# Altium PCB miaow-foc-board.pcbdoc (part 2 of 10)
Units mil, origin at the board's own origin, x right, y up, seen from the top; angles counter-clockwise.
Board outline 2755.91 x 3149.61 mil, 6 copper layers (SIG1, GND2, SIG3, PWR4, GND5, SIG6), stack 60.566 mil thick; 437 components, 392 nets, 2120 pads, 1697 vias.
Unrouted connection lines stored in the file: 1090.
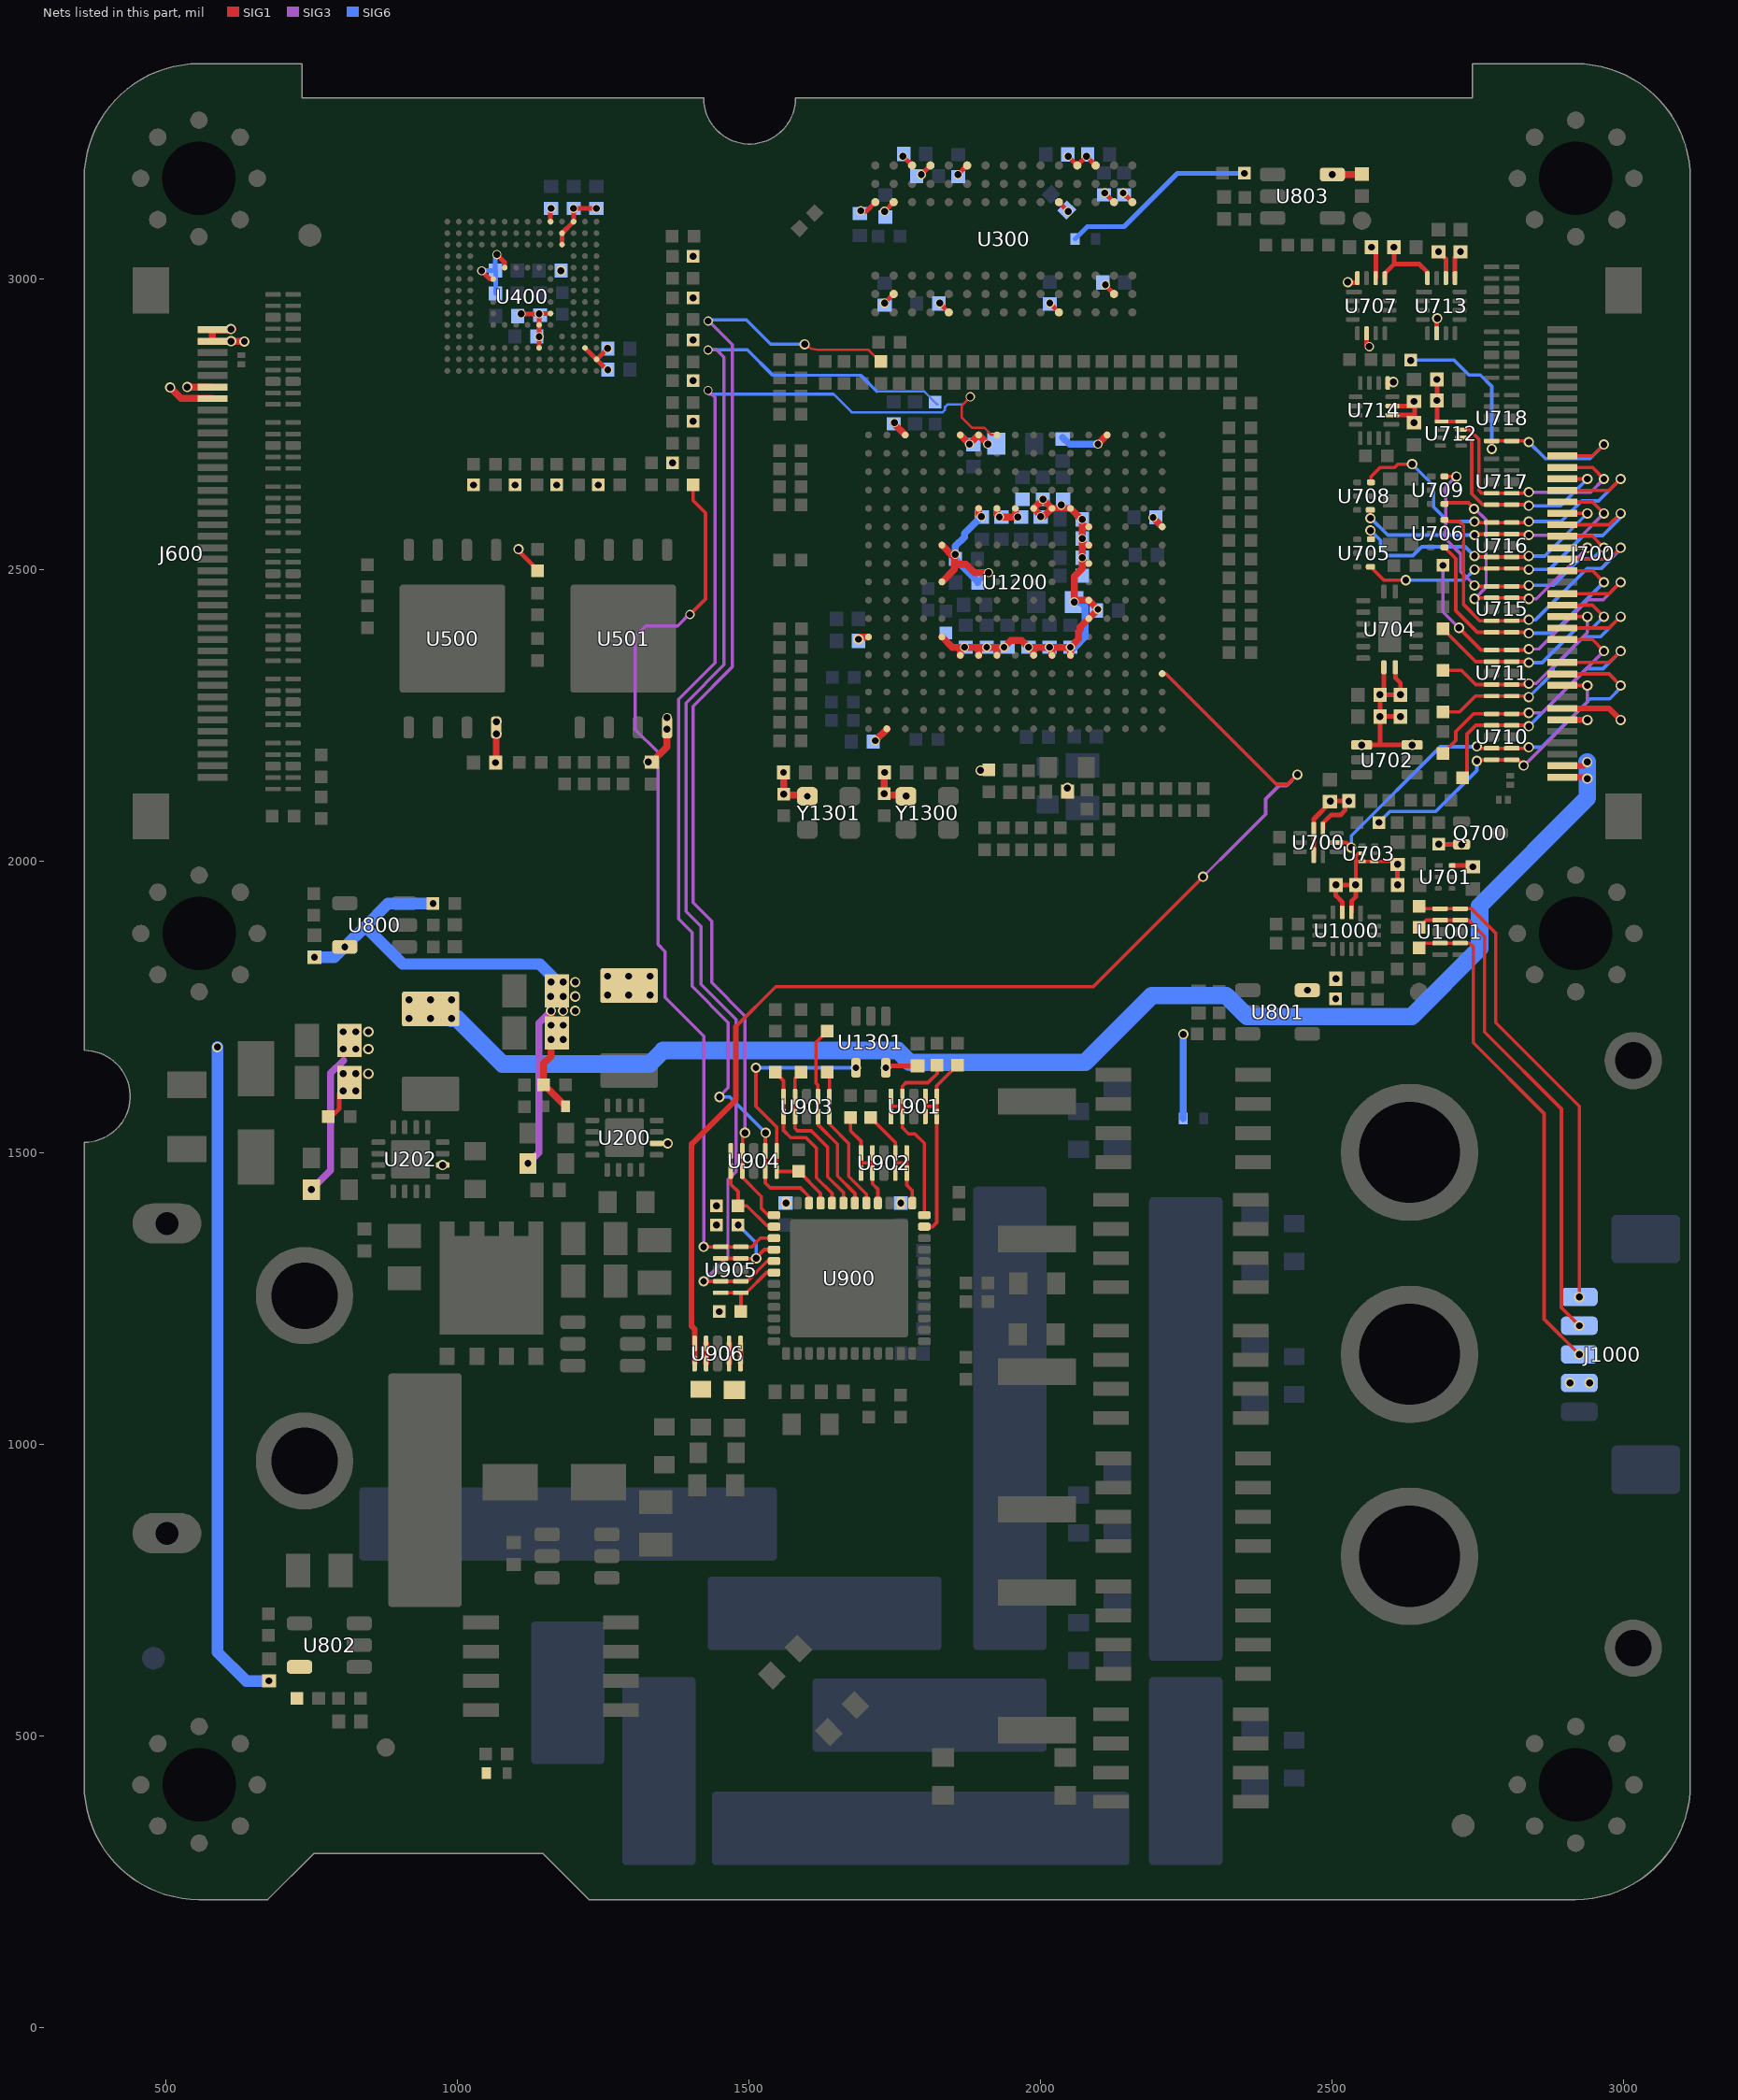
[diagram p6: the nets of this part, all layers, seen from the top]

## Footprints (in the part's own frame and the unit in brackets; to place one, negate y for a bottom-side part, rotate by r counter-clockwise, add the part's x,y. Pads: shape width x height; smd on the part's side, far side on the other; paste and mask are expansions set on the pad) (continued)
IS42S32800J-6BLI [mm] "BGA, 90-Leads, Body 8.00x13.00mmx1.20mm, Pitch 0.80mm"
  round 0.36 smd: A1(-3.2,5.6) A2(-2.4,5.6) A3(-1.6,5.6) A7(1.6,5.6) A8(2.4,5.6) A9(3.2,5.6) B1(-3.2,4.8) B2(-2.4,4.8) B3(-1.6,4.8) B7(1.6,4.8) B8(2.4,4.8) B9(3.2,4.8) C1(-3.2,4) C2(-2.4,4) C3(-1.6,4) C7(1.6,4) C8(2.4,4) C9(3.2,4) D1(-3.2,3.2) D2(-2.4,3.2) D3(-1.6,3.2) D7(1.6,3.2) D8(2.4,3.2) D9(3.2,3.2) E1(-3.2,2.4) E2(-2.4,2.4) E3(-1.6,2.4) E7(1.6,2.4) E8(2.4,2.4) E9(3.2,2.4) F1(-3.2,1.6) F2(-2.4,1.6) F3(-1.6,1.6) F7(1.6,1.6) F8(2.4,1.6) F9(3.2,1.6) G1(-3.2,0.8) G2(-2.4,0.8) G3(-1.6,0.8) G7(1.6,0.8) G8(2.4,0.8) G9(3.2,0.8) H1(-3.2,0) H2(-2.4,0) H3(-1.6,0) H7(1.6,0) H8(2.4,0) H9(3.2,0) J1(-3.2,-0.8) J2(-2.4,-0.8) J3(-1.6,-0.8) J7(1.6,-0.8) J8(2.4,-0.8) J9(3.2,-0.8) K1(-3.2,-1.6) K2(-2.4,-1.6) K3(-1.6,-1.6) K7(1.6,-1.6) K8(2.4,-1.6) K9(3.2,-1.6) L1(-3.2,-2.4) L2(-2.4,-2.4) L3(-1.6,-2.4) L7(1.6,-2.4) L8(2.4,-2.4) L9(3.2,-2.4) M1(-3.2,-3.2) M2(-2.4,-3.2) M3(-1.6,-3.2) M7(1.6,-3.2) M8(2.4,-3.2) M9(3.2,-3.2) N1(-3.2,-4) N2(-2.4,-4) N3(-1.6,-4) N7(1.6,-4) N8(2.4,-4) N9(3.2,-4) P1(-3.2,-4.8) P2(-2.4,-4.8) P3(-1.6,-4.8) P7(1.6,-4.8) P8(2.4,-4.8) P9(3.2,-4.8) R1(-3.2,-5.6) R2(-2.4,-5.6) R3(-1.6,-5.6) R7(1.6,-5.6) R8(2.4,-5.6) R9(3.2,-5.6)
  silkscreen extent -4,-6.5 4,6.5, body extent -4,-6.5 4,6.5, height 1.2
KLMAG2GEND-B031 [mm] "BGA, 153-Leads, Body 11.50x13.00mmx1.00mm, Pitch 0.50mm"
  round 0.25 smd: A1(-3.25,3.25) A2(-2.75,3.25) A3(-2.25,3.25) A4(-1.75,3.25) A5(-1.25,3.25) A6(-0.75,3.25) A7(-0.25,3.25) A8(0.25,3.25) A9(0.75,3.25) A10(1.25,3.25) A11(1.75,3.25) A12(2.25,3.25) A13(2.75,3.25) A14(3.25,3.25) B1(-3.25,2.75) B2(-2.75,2.75) B3(-2.25,2.75) B4(-1.75,2.75) B5(-1.25,2.75) B6(-0.75,2.75) B7(-0.25,2.75) B8(0.25,2.75) B9(0.75,2.75) B10(1.25,2.75) B11(1.75,2.75) B12(2.25,2.75) B13(2.75,2.75) B14(3.25,2.75) C1(-3.25,2.25) C2(-2.75,2.25) C3(-2.25,2.25) C4(-1.75,2.25) C5(-1.25,2.25) C6(-0.75,2.25) C7(-0.25,2.25) C8(0.25,2.25) C9(0.75,2.25) C10(1.25,2.25) C11(1.75,2.25) C12(2.25,2.25) C13(2.75,2.25) C14(3.25,2.25) D1(-3.25,1.75) D2(-2.75,1.75) D3(-2.25,1.75) D4(-1.75,1.75) D12(2.25,1.75) D13(2.75,1.75) D14(3.25,1.75) E1(-3.25,1.25) E2(-2.75,1.25) E3(-2.25,1.25) E5(-1.25,1.25) E6(-0.75,1.25) E7(-0.25,1.25) E8(0.25,1.25) E9(0.75,1.25) E10(1.25,1.25) E12(2.25,1.25) E13(2.75,1.25) E14(3.25,1.25) F1(-3.25,0.75) F2(-2.75,0.75) F3(-2.25,0.75) F5(-1.25,0.75) F10(1.25,0.75) F12(2.25,0.75) F13(2.75,0.75) F14(3.25,0.75) G1(-3.25,0.25) G2(-2.75,0.25) G3(-2.25,0.25) G5(-1.25,0.25) G10(1.25,0.25) G12(2.25,0.25) G13(2.75,0.25) G14(3.25,0.25) H1(-3.25,-0.25) H2(-2.75,-0.25) H3(-2.25,-0.25) H5(-1.25,-0.25) H10(1.25,-0.25) H12(2.25,-0.25) H13(2.75,-0.25) H14(3.25,-0.25) J1(-3.25,-0.75) J2(-2.75,-0.75) J3(-2.25,-0.75) J5(-1.25,-0.75) J10(1.25,-0.75) J12(2.25,-0.75) J13(2.75,-0.75) J14(3.25,-0.75) K1(-3.25,-1.25) K2(-2.75,-1.25) K3(-2.25,-1.25) K5(-1.25,-1.25) K6(-0.75,-1.25) K7(-0.25,-1.25) K8(0.25,-1.25) K9(0.75,-1.25) K10(1.25,-1.25) K12(2.25,-1.25) K13(2.75,-1.25) K14(3.25,-1.25) L1(-3.25,-1.75) L2(-2.75,-1.75) L3(-2.25,-1.75) L12(2.25,-1.75) L13(2.75,-1.75) L14(3.25,-1.75) M1(-3.25,-2.25) M2(-2.75,-2.25) M3(-2.25,-2.25) M4(-1.75,-2.25) M5(-1.25,-2.25) M6(-0.75,-2.25) M7(-0.25,-2.25) M8(0.25,-2.25) M9(0.75,-2.25) M10(1.25,-2.25) M11(1.75,-2.25) M12(2.25,-2.25) M13(2.75,-2.25) M14(3.25,-2.25) N1(-3.25,-2.75) N2(-2.75,-2.75) N3(-2.25,-2.75) N4(-1.75,-2.75) N5(-1.25,-2.75) N6(-0.75,-2.75) N7(-0.25,-2.75) N8(0.25,-2.75) N9(0.75,-2.75) N10(1.25,-2.75) N11(1.75,-2.75) N12(2.25,-2.75) N13(2.75,-2.75) N14(3.25,-2.75) P1(-3.25,-3.25) P2(-2.75,-3.25) P3(-2.25,-3.25) P4(-1.75,-3.25) P5(-1.25,-3.25) P6(-0.75,-3.25) P7(-0.25,-3.25) P8(0.25,-3.25) P9(0.75,-3.25) P10(1.25,-3.25) P11(1.75,-3.25) P12(2.25,-3.25) P13(2.75,-3.25) P14(3.25,-3.25)
  silkscreen extent -5.75,-6.5 5.75,6.5, body extent -5.75,-6.5 5.75,6.5, height 1
L0402 [mm] "Chip Inductor, 2-Leads, Body 1.00x0.50mm, IPC Medium Density"
  rect 0.56x0.62 smd: 1(-0.47,0) 2(0.47,0)
  body extent -0.53,-0.28 0.53,0.28, height 0.55
LCC40PW-M [mm]
  round 6 hole 4.4: 1(-8.8,-11.079) 2(0,-11.079) 3(8.8,-11.079)
  round 2.5 hole 1.6: ""(-12.8,-1.329) ""(12.8,-1.329)
  body extent -14.23,-14.45 14.23,14.45, height 13.55
LM74700QDBVR-Q1 [mm] "SOT23, 6-Leads, Body 2.90x2.80mm, Pitch 0.95mm, IPC Medium Density"
  rrect50% 1.1x0.6 smd: 1(-1.3,0.95) 2(-1.3,0) 3(-1.3,-0.95) 4(1.3,-0.95) 5(1.3,0) 6(1.3,0.95)
  silkscreen extent -0.56,0.7 -0.05,1.2, body extent -1.5,-1.53 1.5,1.53, height 1.45
MARKPOINT-1.0#1 [mm]
  round 1 smd: ""(0,0)
  round 3 on Bottom Solder: ""(0,0)
  SIG1 pour cut-out: 0,-1.494 -0.572,-1.38 -1.056,-1.056 -1.38,-0.572 -1.494,0 -1.494,0 -1.38,0.572 -1.056,1.056 -0.572,1.38 0,1.494 0,1.494 0.572,1.38 1.056,1.056 1.38,0.572 1.494,0 1.494,0 1.38,-0.572 1.056,-1.056 0.572,-1.38 0,-1.494
MARKPOINT-1.0#2 [mm]
  round 1 smd: ""(0,0)
  round 3 on Top Solder: ""(0,0)
  SIG1 pour cut-out: 0,-1.494 -0.572,-1.38 -1.056,-1.056 -1.38,-0.572 -1.494,0 -1.494,0 -1.38,0.572 -1.056,1.056 -0.572,1.38 0,1.494 0,1.494 0.572,1.38 1.056,1.056 1.38,0.572 1.494,0 1.494,0 1.38,-0.572 1.056,-1.056 0.572,-1.38 0,-1.494
MOLEX-532610571 [mm]
  rrect50% 0.8x1.6 smd: 1(2.5,-1.45) 2(1.25,-1.45) 3(0,-1.45) 4(-1.25,-1.45) 5(-2.5,-1.45)
  rrect20% 2.1x3 smd: PAD(-5.023,1.45) PAD(5.023,1.45)
  body extent -5.55,-2 5.55,3.2, height 3.4
MX25L25645GZ2I-08G [mm] "SON, 8-Leads, Body 6.00x8.00mm, Pitch 1.27mm, Thermal Pad 4.60x4.70mm, IPC Medium Density"
  rrect50% 0.95x0.45 smd: 1(-3.87,1.905) 2(-3.87,0.635) 3(-3.87,-0.635) 4(-3.87,-1.905) 5(3.87,-1.905) 6(3.87,-0.635) 7(3.87,0.635) 8(3.87,1.905)
  rrect5% 4.7x4.6 smd paste-2.35: 9(0,0)
  silkscreen extent -3.19,1.65 -2.69,2.16, body extent -4.1,-3.05 4.1,3.05, height 0.8
NTC0402 [mm] "Chip Resistor, 2-Leads, Body 1.00x0.50mm, IPC Medium Density"
  rect 0.4x0.5 smd: 1(-0.451,0) 2(0.451,0)
  body extent -0.53,-0.28 0.53,0.28, height 0.55
OK252032768KJBA4SL [mm]
  rrect50% 0.9x0.8 smd: 1(-0.925,-0.725) 2(0.925,-0.725) 3(0.925,0.725) 4(-0.925,0.725)
  silkscreen extent -0.27,-0.98 0.23,-0.47, body extent -1.25,-1 1.25,1, height 0.8
OT252025MJBA4SL [mm]
  rrect50% 0.9x0.8 smd: 1(-0.925,-0.725) 2(0.925,-0.725) 3(0.925,0.725) 4(-0.925,0.725)
  silkscreen extent -0.27,-0.98 0.23,-0.47, body extent -1.25,-1 1.25,1, height 0.8
PESD5V0H1BSF [mm] "DFN, 2-Leads, Body 0.30x0.60mm, Pitch 0.40mm, IPC Medium Density"
  rect 0.25x0.35 smd: 1(-0.2,0) 2(0.2,0)
  body extent -0.31,-0.16 0.31,0.16, height 0.32
POSHOLE-3.2 [mil] "3.2mm hole"
  round 30 smd: ""(-100,0) ""(-70.71,-70.71) ""(-70.71,70.71) ""(0,100) ""(0,-100) ""(70.71,-70.71) ""(70.71,70.71) ""(100,0)
  round 30 smd far side: ""(-100,0) ""(-70.71,-70.71) ""(-70.71,70.71) ""(0,100) ""(0,-100) ""(70.71,-70.71) ""(70.71,70.71) ""(100,0)
  round 0 hole 125.98 unplated: ""(0,0)
  SIG1 pour cut-out: 0,-125 -47.84,-115.48 -88.39,-88.39 -115.48,-47.84 -125,0 -125,0 -115.48,47.84 -88.39,88.39 -47.84,115.48 0,125 0,125 47.84,115.48 88.39,88.39 115.48,47.84 125,0 125,0 115.48,-47.84 88.39,-88.39 47.84,-115.48 0,-125
  SIG6 pour cut-out: 0,-125 -47.84,-115.48 -88.39,-88.39 -115.48,-47.84 -125,0 -125,0 -115.48,47.84 -88.39,88.39 -47.84,115.48 0,125 0,125 47.84,115.48 88.39,88.39 115.48,47.84 125,0 125,0 115.48,-47.84 88.39,-88.39 47.84,-115.48 0,-125
  silkscreen extent -125,-125 125,125
R0402 [mm] "Chip Resistor, 2-Leads, Body 1.00x0.50mm, IPC Medium Density"
  rect 0.55x0.55 smd: 1(-0.475,0) 2(0.475,0)
  body extent -0.55,-0.28 0.55,0.28, height 0.4
R0603 [mm] "Chip Resistor, 2-Leads, Body 1.60x0.80mm, IPC Medium Density"
  rect 0.75x0.9 smd: 1(-0.825,0) 2(0.825,0)
  body extent -0.85,-0.45 0.85,0.45, height 0.55
R1206 [mm] "Chip Resistor, 2-Leads, Body 3.10x1.58mm, IPC Medium Density"
  rect 1.15x1.7 smd: 1(-1.4,0) 2(1.4,0)
  body extent -1.63,-0.85 1.63,0.85, height 0.65
R2512 [mm] "Chip Resistor, 2-Leads, Body 6.35x3.20mm, IPC Medium Density"
  rect 1.15x3.4 smd: 1(-3,0) 2(3,0)
  body extent -3.22,-1.7 3.22,1.7, height 0.65
SK2301AAT [mm] "SOT23, 3-Leads, Body 1.60x1.55mm, Pitch 0.50mm, IPC Medium Density"
  rrect50% 0.75x0.45 smd: D(0.825,0) G(-0.825,0.5) S(-0.825,-0.5)
  body extent -0.82,-0.85 0.82,0.85, height 0.9
SMAJ33CA [mm] "Molded Diode, 2-Leads, Body 5.00x2.67mm, IPC Medium Density"
  rect 2.4x1.6 smd: 1(-1.925,0) 2(1.925,0)
  silkscreen extent -0.53,-0.25 -0.02,0.25, body extent -2.82,-1.4 2.82,1.4, height 2.2
SMF15CA [mm] "SODFL, 2-Leads, Body 1.80x3.73mm, IPC Medium Density"
  rect 1.2x1.2 smd: 1(-1.526,0) 2(1.526,0)
  body extent -1.86,-1 1.86,1, height 1.35
SN74AVC4T245RSVR [mm] "QFN, 16-Leads, Body 1.80x2.60mm, Pitch 0.40mm, IPC Medium Density"
  rrect50% 0.7x0.2 smd: 1(-0.75,0.6)
  rrect50% 0.6x0.2 smd: 2(-0.8,0.2) 3(-0.8,-0.2) 4(-0.8,-0.6) 9(0.8,-0.6) 10(0.8,-0.2) 11(0.8,0.2) 12(0.8,0.6)
  rrect50% 0.2x0.6 smd: 5(-0.6,-1.2) 6(-0.2,-1.2) 7(0.2,-1.2) 8(0.6,-1.2) 13(0.6,1.2) 14(0.2,1.2) 15(-0.2,1.2) 16(-0.6,1.2)
  silkscreen extent -1.12,0.91 -0.89,0.91, body extent -0.97,-1.38 0.97,1.38, height 0.55
SN74AXC1T45DEAR [mm] "PSON, 6-Leads, Body 1.00x1.00mm, Pitch 0.35mm, IPC Medium Density"
  rrect50% 0.36x0.16 smd: 1(-0.25,0.35)
  rrect50% 0.31x0.16 smd: 2(-0.275,0) 3(-0.275,-0.35) 4(0.275,-0.35) 5(0.275,0) 6(0.275,0.35)
  silkscreen extent -0.42,0.67 -0.1,0.67, body extent -0.53,-0.53 0.53,0.53, height 0.4
SN74AXC2T245RSWR [mm] "QFN, 10-Leads, Body 1.40x1.80mm, Pitch 0.40mm, IPC Medium Density"
  rrect50% 0.7x0.2 smd: 1(-0.55,0.2)
  rrect50% 0.6x0.2 smd: 2(-0.6,-0.2) 6(0.6,-0.2) 7(0.6,0.2)
  rrect50% 0.2x0.6 smd: 3(-0.4,-0.8) 4(0,-0.8) 5(0.4,-0.8) 8(0.4,0.8) 9(0,0.8) 10(-0.4,0.8)
  silkscreen extent -0.89,0.51 -0.68,0.51, body extent -0.77,-0.97 0.77,0.97, height 0.55
SN74AXC4T774RSVR [mm] "QFN, 16-Leads, Body 1.80x2.60mm, Pitch 0.40mm, IPC Medium Density"
  rrect50% 0.7x0.2 smd: 1(-0.75,0.6)
  rrect50% 0.6x0.2 smd: 2(-0.8,0.2) 3(-0.8,-0.2) 4(-0.8,-0.6) 9(0.8,-0.6) 10(0.8,-0.2) 11(0.8,0.2) 12(0.8,0.6)
  rrect50% 0.2x0.6 smd: 5(-0.6,-1.2) 6(-0.2,-1.2) 7(0.2,-1.2) 8(0.6,-1.2) 13(0.6,1.2) 14(0.2,1.2) 15(-0.2,1.2) 16(-0.6,1.2)
  silkscreen extent -1.1,0.95 -0.9,0.95, body extent -0.97,-1.38 0.97,1.38, height 0.55
SN74LVC1G08DCKR [mm] "SOT23, 5-Leads, Body 2.00x2.10mm, Pitch 0.65mm, IPC Medium Density"
  rrect50% 0.85x0.4 smd: 1(-1.125,0.65) 2(-1.125,0) 3(-1.125,-0.65) 4(1.125,-0.65) 5(1.125,0.65)
  silkscreen extent -0.5,0.4 0.01,0.9, body extent -1.2,-1.07 1.2,1.07, height 1.1
SN74LVC1G14DRYR [mm] "PSON, 6-Leads, Body 1.45x1.00mm, Pitch 0.50mm, IPC Medium Density"
  rrect50% 0.35x0.2 smd: 1(-0.275,0.5)
  rrect50% 0.3x0.2 smd: 2(-0.3,0) 3(-0.3,-0.5) 4(0.3,-0.5) 5(0.3,0) 6(0.3,0.5)
  silkscreen extent -0.45,0.86 -0.12,0.86, body extent -0.53,-0.75 0.53,0.75, height 0.6
STM32H750XBH6 [mm] "BGA, 265-Leads, Body 14.00x14.00mmx1.20mm, Pitch 0.80mm"
  round 0.3 smd: A1(-6.4,6.4) A2(-5.6,6.4) A3(-4.8,6.4) A4(-4,6.4) A5(-3.2,6.4) A6(-2.4,6.4) A7(-1.6,6.4) A8(-0.8,6.4) A9(0,6.4) A10(0.8,6.4) A11(1.6,6.4) A12(2.4,6.4) A13(3.2,6.4) A14(4,6.4) A15(4.8,6.4) A16(5.6,6.4) A17(6.4,6.4) B1(-6.4,5.6) B2(-5.6,5.6) B3(-4.8,5.6) B4(-4,5.6) B5(-3.2,5.6) B6(-2.4,5.6) B7(-1.6,5.6) B8(-0.8,5.6) B9(0,5.6) B10(0.8,5.6) B11(1.6,5.6) B12(2.4,5.6) B13(3.2,5.6) B14(4,5.6) B15(4.8,5.6) B16(5.6,5.6) B17(6.4,5.6) C1(-6.4,4.8) C2(-5.6,4.8) C3(-4.8,4.8) C4(-4,4.8) C5(-3.2,4.8) C6(-2.4,4.8) C7(-1.6,4.8) C8(-0.8,4.8) C9(0,4.8) C10(0.8,4.8) C11(1.6,4.8) C12(2.4,4.8) C13(3.2,4.8) C14(4,4.8) C15(4.8,4.8) C16(5.6,4.8) C17(6.4,4.8) D1(-6.4,4) D2(-5.6,4) D3(-4.8,4) D4(-4,4) D5(-3.2,4) D6(-2.4,4) D7(-1.6,4) D8(-0.8,4) D9(0,4) D10(0.8,4) D11(1.6,4) D12(2.4,4) D13(3.2,4) D14(4,4) D15(4.8,4) D16(5.6,4) D17(6.4,4) E1(-6.4,3.2) E2(-5.6,3.2) E3(-4.8,3.2) E4(-4,3.2) E5(-3.2,3.2) E6(-2.4,3.2) E7(-1.6,3.2) E8(-0.8,3.2) E9(0,3.2) E10(0.8,3.2) E11(1.6,3.2) E12(2.4,3.2) E13(3.2,3.2) E14(4,3.2) E15(4.8,3.2) E16(5.6,3.2) E17(6.4,3.2) F1(-6.4,2.4) F2(-5.6,2.4) F3(-4.8,2.4) F4(-4,2.4) F5(-3.2,2.4) F13(3.2,2.4) F14(4,2.4) F15(4.8,2.4) F16(5.6,2.4) F17(6.4,2.4) G1(-6.4,1.6) G2(-5.6,1.6) G3(-4.8,1.6) G4(-4,1.6) G5(-3.2,1.6) G7(-1.6,1.6) G8(-0.8,1.6) G9(0,1.6) G10(0.8,1.6) G11(1.6,1.6) G13(3.2,1.6) G14(4,1.6) G15(4.8,1.6) G16(5.6,1.6) G17(6.4,1.6) H1(-6.4,0.8) H2(-5.6,0.8) H3(-4.8,0.8) H4(-4,0.8) H5(-3.2,0.8) H7(-1.6,0.8) H8(-0.8,0.8) H9(0,0.8) H10(0.8,0.8) H11(1.6,0.8) H13(3.2,0.8) H14(4,0.8) H15(4.8,0.8) H16(5.6,0.8) H17(6.4,0.8) J1(-6.4,0) J2(-5.6,0) J3(-4.8,0) J4(-4,0) J5(-3.2,0) J7(-1.6,0) J8(-0.8,0) J9(0,0) J10(0.8,0) J11(1.6,0) J13(3.2,0) J14(4,0) J15(4.8,0) J16(5.6,0) J17(6.4,0) K1(-6.4,-0.8) K2(-5.6,-0.8) K3(-4.8,-0.8) K4(-4,-0.8) K5(-3.2,-0.8) K7(-1.6,-0.8) K8(-0.8,-0.8) K9(0,-0.8) K10(0.8,-0.8) K11(1.6,-0.8) K13(3.2,-0.8) K14(4,-0.8) K15(4.8,-0.8) K16(5.6,-0.8) K17(6.4,-0.8) L1(-6.4,-1.6) L2(-5.6,-1.6) L3(-4.8,-1.6) L4(-4,-1.6) L5(-3.2,-1.6) L7(-1.6,-1.6) L8(-0.8,-1.6) L9(0,-1.6) L10(0.8,-1.6) L11(1.6,-1.6) L13(3.2,-1.6) L14(4,-1.6) L15(4.8,-1.6) L16(5.6,-1.6) L17(6.4,-1.6) M1(-6.4,-2.4) M2(-5.6,-2.4) M3(-4.8,-2.4) M4(-4,-2.4) M5(-3.2,-2.4) M13(3.2,-2.4) M14(4,-2.4) M15(4.8,-2.4) M16(5.6,-2.4) M17(6.4,-2.4) N1(-6.4,-3.2) N2(-5.6,-3.2) N3(-4.8,-3.2) N4(-4,-3.2) N5(-3.2,-3.2) N6(-2.4,-3.2) N7(-1.6,-3.2) N8(-0.8,-3.2) N9(0,-3.2) N10(0.8,-3.2) N11(1.6,-3.2) N12(2.4,-3.2) N13(3.2,-3.2) N14(4,-3.2) N15(4.8,-3.2) N16(5.6,-3.2) N17(6.4,-3.2) P1(-6.4,-4) P2(-5.6,-4) P3(-4.8,-4) P4(-4,-4) P5(-3.2,-4) P6(-2.4,-4) P7(-1.6,-4) P8(-0.8,-4) P9(0,-4) P10(0.8,-4) P11(1.6,-4) P12(2.4,-4) P13(3.2,-4) P14(4,-4) P15(4.8,-4) P16(5.6,-4) P17(6.4,-4) R1(-6.4,-4.8) R2(-5.6,-4.8) R3(-4.8,-4.8) R4(-4,-4.8) R5(-3.2,-4.8) R6(-2.4,-4.8) R7(-1.6,-4.8) R8(-0.8,-4.8) R9(0,-4.8) R10(0.8,-4.8) R11(1.6,-4.8) R12(2.4,-4.8) R13(3.2,-4.8) R14(4,-4.8) R15(4.8,-4.8) R16(5.6,-4.8) R17(6.4,-4.8) T1(-6.4,-5.6) T2(-5.6,-5.6) T3(-4.8,-5.6) T4(-4,-5.6) T5(-3.2,-5.6) T6(-2.4,-5.6) T7(-1.6,-5.6) T8(-0.8,-5.6) T9(0,-5.6) T10(0.8,-5.6) T11(1.6,-5.6) T12(2.4,-5.6) T13(3.2,-5.6) T14(4,-5.6) T15(4.8,-5.6) T16(5.6,-5.6) T17(6.4,-5.6) U1(-6.4,-6.4) U2(-5.6,-6.4) U3(-4.8,-6.4) U4(-4,-6.4) U5(-3.2,-6.4) U6(-2.4,-6.4) U7(-1.6,-6.4) U8(-0.8,-6.4) U9(0,-6.4) U10(0.8,-6.4) U11(1.6,-6.4) U12(2.4,-6.4) U13(3.2,-6.4) U14(4,-6.4) U15(4.8,-6.4) U16(5.6,-6.4) U17(6.4,-6.4)
  silkscreen extent -7,-7 7,7, body extent -7,-7 7,7, height 1.2
TLV9061IDBVR [mm] "SOT23, 5-Leads, Body 2.90x2.80mm, Pitch 0.95mm, IPC Medium Density"
  rrect50% 1.1x0.6 smd: 1(-1.3,0.95) 2(-1.3,0) 3(-1.3,-0.95) 4(1.3,-0.95) 5(1.3,0.95)
  silkscreen extent -0.55,0.7 -0.04,1.2, body extent -1.5,-1.53 1.5,1.53, height 1.45
TP [mm]
  round 0.8 smd: 0(0,0)
TPESD8004MUTAG [mm]
  rrect45% 0.675x0.2 smd: 1(-0.437,1) 2(-0.437,0.5) 4(-0.437,-0.5) 5(-0.437,-1) 6(0.437,-1) 7(0.437,-0.5) 9(0.437,0.5) 10(0.437,1)
  rrect45% 0.675x0.4 smd paste-0.041: 3(-0.437,0) 8(0.437,0)
  silkscreen extent -0.69,1.32 -0.18,1.32, body extent -0.5,-1.25 0.5,1.25, height 0.5
TPS62130RGTR [mm] "PQFN, 16-Leads, Body 3.00x3.00mm, Pitch 0.50mm, Thermal Pad 1.68x1.68mm, IPC Medium Density"
  rrect50% 0.6x0.24 smd: 1(-1.4,0.75) 2(-1.4,0.25) 3(-1.4,-0.25) 4(-1.4,-0.75) 9(1.4,-0.75) 10(1.4,-0.25) 11(1.4,0.25) 12(1.4,0.75)
  rrect50% 0.24x0.6 smd: 5(-0.75,-1.4) 6(-0.25,-1.4) 7(0.25,-1.4) 8(0.75,-1.4) 13(0.75,1.4) 14(0.25,1.4) 15(-0.25,1.4) 16(-0.75,1.4)
  rrect10% 1.68x1.68 smd paste-2539.97: 17(0,0)
  silkscreen extent -1.55,-1.55 1.55,1.55, body extent -1.55,-1.55 1.55,1.55, height 1
TXB0101DCKR [mm] "SOT23, 6-Leads, Body 2.00x2.10mm, Pitch 0.65mm, IPC Medium Density"
  rrect25% 0.9x0.4 smd: 1(-1.1,0.65) 2(-1.1,0) 3(-1.1,-0.65) 4(1.1,-0.65) 5(1.1,0) 6(1.1,0.65)
  silkscreen extent -0.45,0.4 0.06,0.9, body extent -1.2,-1.07 1.2,1.07, height 1.1
TXS0102DQER [mm] "SON, 8-Leads, Body 1.40x1.00mm, Pitch 0.35mm, IPC Medium Density"
  rrect50% 0.6x0.175 smd: 1(-0.4,0.525)
  rrect50% 0.5x0.175 smd: 2(-0.45,0.175) 3(-0.45,-0.175) 4(-0.45,-0.525) 5(0.45,-0.525) 6(0.45,-0.175) 7(0.45,0.175) 8(0.45,0.525)
  silkscreen extent -0.63,0.83 -0.21,0.83, body extent -0.58,-0.72 0.58,0.72, height 0.4
TXV0106BQBR [mm] "QFN, 16-Leads, Body 2.50x3.50mm, Pitch 0.50mm, Thermal Pad 1.00x2.00mm, IPC Medium Density"
  rrect50% 0.24x0.6 smd: 1(-0.25,1.65) 8(-0.25,-1.65) 9(0.25,-1.65) 16(0.25,1.65)
  rrect50% 0.6x0.24 smd: 2(-1.15,1.25) 3(-1.15,0.75) 4(-1.15,0.25) 5(-1.15,-0.25) 6(-1.15,-0.75) 7(-1.15,-1.25) 10(1.15,-1.25) 11(1.15,-0.75) 12(1.15,-0.25) 13(1.15,0.25) 14(1.15,0.75) 15(1.15,1.25)
  rrect10% 1x2 smd: 17(0,0)
  silkscreen extent -1.3,-1.8 1.3,1.96, body extent -1.35,-1.85 1.35,1.85, height 0.8
XT60PW-M [mm]
  round 4.25 hole 2.9: 1(-3.6,-3) 2(3.6,-3)
  oval 1.75x3 hole 1 slot 2 at 90 deg: 3(-6.75,3) 4(6.75,3)
  body extent -7.95,-4.85 7.95,13.35, height 8.45

## Part data
BAR1400 BAR1401 BAR1402 BAR1403 BAR1404 BAR1405 BAR1406 BAR1407 BAR1408 BAR1409: "SMD copper bar for current reinforcement"
C200 C201 C205 C206 C207 C210 C211 C212 C214 C215 C216 C217 C218 C219 C300 C301 C302 C303 C304 C305 C306 C307 C308 C309 C310 C311 C312 C313 C400 C401 C402 C403 C404 C405 C406 C407 C408 C409 C410 C500 C501 C700 C701 C702 C703 C704 C705 C706 C707 C708 C709 C710 C711 C712 C713 C714 C715 C716 C717 C718 C719 C720 C721 C800 C801 C802 C803 C804 C805 C806 C807 C900 C901 C902 C903 C904 C905 C906 C907 C908 C909 C910 C911 C1000 C1001 C1200 C1201 C1202 C1203 C1204 C1205 C1206 C1207 C1208 C1209 C1210 C1211 C1212 C1213 C1214 C1215 C1216 C1217 C1218 C1219 C1220 C1221 C1222 C1223 C1224 C1225 C1226 C1227 C1228 C1229 C1230 C1231 C1232 C1233 C1300 C1301 C1302 C1303 C1304 C1305: voltage=25V, precision=5%
C202 C203 C204 C208 C209 C213: voltage=50V, precision=5%
D200 D201: "TVS/ESD", Supplier Part Number 1=C316048, Supplier 1=LCSC
D600 D700 D701: "TVS/ESD", Supplier Part Number 1=C477989, Supplier 1=LCSC
D900 D901 D902 D903 D904 D905: "TVS/ESD", Supplier Part Number 1=C123803, Supplier 1=LCSC
J200: "CONNECTOR - dc supply", Supplier Part Number 1=C98732, Supplier 1=LCSC
J600: library part FPC-RGBLCD, Supplier Part Number 1=C262674, Supplier 1=LCSC
J700: library part FPC-DEBUG, "FPC", Supplier Part Number 1=C262674, Supplier 1=LCSC
J900: "CONNECTOR - 3pin, power", Supplier Part Number 1=C7437310, Supplier 1=LCSC
J1000: "HEADER - 1.25 - 5p", Supplier Part Number 1=C668616, Supplier 1=LCSC, Supplier 2=LCSC, Supplier Part Number 2=C17256390
L202: library part L, Code_IEC=1005, Code_JEITA=0402, LatestRevisionDate=29-May-2009, LatestRevisionNote="IPC-7351 Footprint Added.", PackageDescription="Chip Inductor", PackageReference=0402-A, Published=8-Jun-2000, Publisher="Altium Limited"
Q200: "NMOS", Supplier Part Number 1=C115943, Supplier 1=LCSC
Q201: "NMOS", Supplier Part Number 1=C535695, Supplier 1=LCSC
Q700: "PMOS", Supplier Part Number 1=C5334586, Supplier 1=LCSC
Q900 Q901 Q902 Q903 Q904 Q905: Supplier Part Number 1=C535695, Supplier 1=LCSC
RT800 RT801 RT802 RT803: "NTC - 10K, 3380, 1%", Supplier Part Number 1=C13564, precision=1%, Supplier 1=LCSC
U200 U202: Supplier Part Number 1=C43590, Supplier 1=LCSC
U201 U203: "IDEAL DIODE", Supplier Part Number 1=C2941042, Supplier 1=LCSC
U300: Supplier Part Number 1=C1351419, Supplier 1=LCSC
U400: "EMMC", Supplier Part Number 1=826874-KLMAG2GEND-B031, Supplier 1="Win Source"
U500 U501: Supplier Part Number 1=C2802978, Supplier 1=LCSC
U600 U601 U602 U603 U604 U605 U606 U607 U710 U711 U715 U716 U717 U718 U719 U720 U901 U902 U903 U904 U905 U906 U1001: "TVS/ESD", Supplier Part Number 1=C2827679, Supplier 1=LCSC
U700: "LEVEL SHIFT", Supplier Part Number 1=C1882550, Supplier 1=LCSC
U701: "INVERTER - 1bit schmitt", Supplier Part Number 1=C2878125, Supplier 1=LCSC
U702: "LEVEL SHIFT", Supplier Part Number 1=C324081, Supplier 1=LCSC
U703: "LEVEL SHIFT - 1bit, 0.65V - 3.6V, 500Mbps", Supplier Part Number 1=C2677436, Supplier 1=LCSC
U704: "LEVEL SHIFT", Supplier Part Number 1=C22414342, Supplier 1=LCSC
U705 U706 U708 U709: "SCHMITT - 2bits", Supplier Part Number 1=C548609, Supplier 1=LCSC
U707 U713: "LEVEL SHIFT - 4bits, 0.65V - 3.6V, 310Mbps", Supplier Part Number 1=C779392, Supplier 1=LCSC
U712: Supplier Part Number 1=C2652935, ComponentLink1Description=Datasheet, ComponentLink1URL=..\ds\txs0102dqer.pdf, Supplier 1=LCSC
U714 U1000: "LEVEL SHIFT - 4bits, 2grps, 1.2V - 3.6V, 380Mbps", Supplier Part Number 1=C133244, Supplier 1=LCSC
U800 U801 U802 U803: "OPA - 1ch, 1.8V - 5.5V, r2r, 0.3mV, 10MHz, 10nVHz^0.5, 0.5pA", Supplier Part Number 1=C398358, Supplier 1=LCSC
U900: Supplier Part Number 1=C545497, Supplier 1=LCSC
U1200: "MCU", Supplier Part Number 1=C405932, Supplier 1=LCSC
U1301: "AND GATE  - 1bit", Supplier Part Number 1=C7832, Supplier 1=LCSC
Y1300: Supplier Part Number 1=C717683, Supplier 1=LCSC
Y1301: Supplier Part Number 1=C669098, Supplier 1=LCSC
L200 L201: Code_IEC=1005, Code_JEITA=0402, LatestRevisionDate=29-May-2009, LatestRevisionNote="IPC-7351 Footprint Added.", PackageDescription="Chip Inductor", PackageReference=0402-A, Published=8-Jun-2000, Publisher="Altium Limited"
R200 R201 R202 R203 R204 R205 R206 R400 R401 R402 R403 R404 R405 R406 R407 R408 R409 R410 R411 R412 R413 R414 R415 R416 R417 R418 R419 R420 R421 R500 R501 R502 R503 R504 R505 R506 R507 R508 R600 R601 R602 R700 R701 R702 R703 R704 R705 R706 R707 R708 R709 R710 R711 R712 R713 R714 R715 R800 R801 R802 R803 R804 R805 R806 R807 R808 R809 R810 R811 R812 R813 R814 R815 R900 R901 R902 R903 R904 R905 R906 R907 R908 R909 R910 R911 R912 R913 R914 R915 R916 R917 R918 R919 R920 R921 R922 R923 R924 R925 R926 R927 R928 R1000 R1001 R1002 R1003 R1004 R1005 R1200 R1300 R1301 R1302 R1303 R1304 R1305 R1306 R1307 R1308 R1309 R1310 R1311 R1312 R1313 R1314 R1315 R1316 R1317 R1318 R1319 R1320 R1321 R1322 R1323 R1324 R1325 R1326 R1327 R1328 R1329 R1330 R1331 R1332 R1333 R1334 R1335 R1336 R1337 R1338 R1339 R1340 R1341 R1342 R1343 R1344 R1345 R1346 R1347 R1348 R1349 R1350 R1351 R1352 R1353 R1354 R1355 R1356 R1357 R1358 R1359 R1360 R1361 R1362 R1363 R1364 R1365 R1366 R1367 R1368 R1369 R1370 R1371 R1372 R1373 R1374 R1375 R1376 R1377 R1378 R1379 R1380 R1381 R1382 R1383 R1384 R1385 R1386 R1387: precision=1%

## Via types
v1: diameter 17.72, hole 11.81, SIG1 to SIG6, tented both sides, 1223 vias
v2: diameter 15.75, hole 11.81, SIG1 to SIG6, tented both sides, 453 vias
v3: diameter 17.72, hole 11.81, SIG1 to SIG6, tented top, 21 vias

## Nets (pads, with @x,y where several pads share a name; then routed paths per layer and width w, separated by ;. In a path a pad name is that pad's centre, name@x,y a point inside that pad or via, vN(x,y) a via of type N, cw(c..) or ccw(c..) an arc to the next point about the centre after c; other vN are vias at no path point)
9_23: R919.2 U900.23 U901.1 U901.2 U901.9 U901.10 | length 363
  SIG1 w6: U900.23@1800.91,1373.62 1815.33,1373.62 1822.36,1380.65 1822.36,1579.89 ; U901.9@1802.68,1562.69 1802.68,1579.89 ; U901.2@1802.68,1597.14 1802.68,1579.89 ; R919.2@1857.61,1650.59 1822.36,1615.34 U901.1@1822.36,1597.14 1822.36,1579.89 ; 1802.68,1579.89 1822.36,1579.89
9_24: R917.2 U900.24 U901.4 U901.5 U901.6 U901.7 | length 380.2
  SIG1 w6: U901.6@1743.62,1562.69 1743.62,1579.89 ; U901.5@1743.62,1597.14 1743.62,1579.89 ; U900.24@1800.91,1393.3 1800.91,1516.56 1784.57,1532.89 1773.78,1532.89 1763.31,1543.37 U901.7@1763.31,1562.69 1763.31,1579.89 ; R917.2@1822.84,1650.59 1822.84,1636.21 1807.17,1620.54 1769.31,1620.54 1763.31,1614.54 U901.4@1763.31,1597.14 1763.31,1579.89 ; 1743.62,1579.89 1763.31,1579.89
9_25: R916.2 U900.25 U902.1 U902.2 U902.9 U902.10 | length 222.2
  SIG1 w6: R916.2@1708.66,1560.52 1751.2,1517.97 U902.2@1751.2,1500.09 1751.2,1482.85 ; U902.9@1751.2,1465.64 1751.2,1482.85 ; U902.1@1770.88,1500.09 1770.88,1482.85 ; U900.25@1780.24,1413.97 1780.24,1435.36 1770.88,1444.71 U902.10@1770.88,1465.64 1770.88,1482.85 ; 1751.2,1482.85 1770.88,1482.85
9_28: R908.2 U900.28 U902.4 U902.5 U902.6 U902.7 | length 212.5
  SIG1 w6: R908.2@1674.13,1560.89 1674.13,1538.19 1692.14,1520.17 U902.5@1692.14,1500.09 1692.14,1483.2 ; U902.6@1692.14,1465.64 1692.14,1483.2 ; U902.4@1711.83,1500.09 1711.83,1483.02 ; U900.28@1721.18,1413.97 1721.18,1437.61 1711.83,1446.97 U902.7@1711.83,1465.64 1711.83,1483.02 ; 1692.14,1483.2 1711.65,1483.2 1711.83,1483.02
9_29: R913.2 U900.29 U903.1 U903.10 | length 252.2
  SIG1 w6: R913.2@1634.52,1638.4 1638.05,1634.87 U903.1@1638.05,1596.65 U903.10@1638.05,1562.2 1638.05,1549.51 1671.18,1516.39 1671.18,1459.67 1701.5,1429.36 U900.29@1701.5,1413.97
9_30: R1315.2 U900.30 U903.2 U903.9 | length 330.8
  SIG1 w6: R1315.2@1634.4,1708.88 1614.82,1689.31 1614.82,1619.79 1618.37,1616.24 U903.2@1618.37,1596.65 U903.9@1618.37,1562.2 1618.37,1548.62 1651.84,1515.14 1651.84,1460.52 1681.81,1430.55 U900.30@1681.81,1413.97
9_31: R912.2 U900.31 U903.4 U903.7 | length 277.1
  SIG1 w6: R912.2@1589.68,1638.4 1585.48,1634.2 1579,1627.72 U903.4@1579,1596.65 U903.7@1579,1562.2 1579,1542.42 1583.49,1537.93 1607.07,1537.93 1634.96,1510.04 1634.96,1459.12 1662.13,1431.95 U900.31@1662.13,1413.97
9_32: R911.2 U900.32 U903.5 U903.6 | length 280.2
  SIG1 w6: R911.2@1544.84,1638.4 1559.31,1623.92 U903.5@1559.31,1596.65 U903.6@1559.31,1562.2 1559.31,1538.89 1571.74,1526.46 1597.91,1526.46 1615.87,1508.5 1615.87,1457.42 1642.44,1430.85 U900.32@1642.44,1413.97
9_33: R905.2 U900.33 U904.1 U904.10 U1301.4 | length 471.3
  SIG1 w6: v1(1512.02,1646.12) 1512.02,1579.93 1547.56,1544.4 U904.1@1547.56,1503.52 U904.10@1547.56,1469.07 1548.35,1468.28 R905.2@1585.51,1468.28 1622.76,1431.04 U900.33@1622.76,1413.97
  SIG6 w6: v1(1512.02,1646.12) v1(1683.55,1646.12)
9_34: U900.34 U904.2 U904.9 U1200.H17 | length 2165.4
  SIG1 w4: v2@1880.53,2797.46 1864.78,2781.7 1864.78,2762.14 1882.62,2744.29 1903.51,2744.29 1916.01,2731.79 U1200.H17@1925.56,2731.79
  SIG1 w6: v1(1528.56,1534.51) 1527.87,1533.82 U904.2@1527.87,1503.52 U904.9@1527.87,1469.07 1527.87,1448.61 1536.4,1440.08 1588.26,1440.08 1603.07,1425.27 U900.34@1603.07,1413.97
  SIG3 w5.5: v2(1429.7,2808.36) 1441.7,2796.36 1441.7,2340.91 1379.46,2278.67 1379.46,1901.42 1402.43,1878.45 1402.43,1785.84 1464.56,1723.71 1464.56,1611.85 v1@1448.83,1596.12
  SIG6 w4: v2(1429.7,2808.36) v2@1431.94,2806.12 ; 1644.96,2802.14 1676.24,2770.87 1832.41,2770.87 1832.84,2771.3 1832.95,2771.3 1836.43,2774.78 1836.43,2779.91 1840.35,2783.83 1866.72,2783.83 v2@1880.22,2797.33
  SIG6 w5.5: v2@1431.94,2802.14 1644.96,2802.14
  SIG6 w6: v1(1449.39,1596.12) 1466.95,1596.12 v1(1528.56,1534.51)
  other v2: 1879.74,2797.24
9_37: R1319.2 U900.37 U904.4 U904.7 | length 1974.1
  SIG1 w4: v1(1595.49,2887.43) ccw(c1617.47,2909.41) 1617.47,2878.33 1704.28,2878.33 1724.65,2857.96 R1319.2@1726.16,2857.96
  SIG1 w6: v1@1492.15,1534.6 1488.95,1534.6 1488.95,1503.97 U904.4@1488.5,1503.52 U904.7@1488.5,1469.07 1488.5,1458.21 1521.22,1425.49 1521.22,1404.85 1532.76,1393.3 U900.37@1543.03,1393.3
  SIG3 w5.5: v2(1430.06,2927.34) 1430.59,2927.87 1471.65,2886.8 1471.65,2334.02 1404.04,2266.41 1404.04,1929.59 1435.91,1897.72 1435.91,1792.16 1493.15,1734.92 v1(1493.15,1534.6)
  SIG6 w5.5: v2(1430.06,2927.34) 1430.59,2927.87 1431.7,2928.98 1495.77,2928.98 1537.31,2887.43 v1(1595.49,2887.43)
9_38: R902.2 U900.38 U904.5 U904.6 | length 175.8
  SIG1 w6: U904.5@1468.82,1503.52 U904.6@1468.82,1469.07 1468.82,1446.12 1481.4,1433.54 R902.2@1481.4,1409.42 1496.41,1409.42 1530.17,1375.66 1540.99,1375.66 U900.38@1543.03,1373.62
9_39: R1323.2 U900.39 U905.1 U905.10 | length 1577.1
  SIG1 w6: v2(1398.7,2423.83) 1398.7,2425.52 1400.54,2425.52 1425.23,2450.21 1425.23,2598.19 1404.21,2619.21 R1323.2@1404.21,2646.24 ; v1@1422.12,1340.65 1423.87,1338.9 U905.1@1451.46,1338.9 U905.10@1485.91,1338.9 1504.57,1338.9 1519.61,1353.93 U900.39@1543.03,1353.93
  SIG3 w5.5: v2(1398.7,2423.83) 1397.86,2424.68 1377.66,2404.48 1322.97,2404.48 1304.84,2386.34 1304.84,2226.44 1343.7,2187.57 1343.7,1857.89 1355.98,1845.61 1355.98,1766.74 1422.24,1700.49 v1@1422.24,1339.02
  other v1: 1422.12,1338.9
9_40: R903.2 U900.40 U905.2 U905.9 | length 168.1
  SIG1 w6: U905.2@1451.46,1319.21 U905.9@1485.91,1319.21 1486.24,1318.88 1510.99,1318.88 1526.36,1334.25 U900.40@1543.03,1334.25
  SIG6 w6: v1(1481.4,1376.49) 1512.32,1345.57 v1(1512.32,1319.32)
9_41: R1326.2 U900.41 U905.4 U905.7 | length 2269.2
  SIG1 w6: v1@1423.87,1279.84 U905.4@1451.46,1279.84 U905.7@1485.91,1279.84 1496.76,1279.84 1531.48,1314.56 U900.41@1543.03,1314.56
  SIG3 w5.5: v1(1422.12,1279.84) 1463.87,1321.59 1463.87,1454.27 1477.64,1468.04 1477.64,1729.23 1417.61,1789.25 1417.61,1888.49 1391.76,1914.35 1391.76,2272.15 1457,2337.39 1457,2865.28 1444.62,2877.67 v2(1429.72,2877.67)
  SIG6 w4: 1719.24,2806.58 1800.65,2806.58 R1326.2@1823.17,2784.06
  SIG6 w5.5: v2(1429.72,2877.67) 1497.42,2877.67 1540.82,2834.27 1691.56,2834.27 1719.24,2806.58
9_42: R904.2 U900.42 U905.5 U905.6 | length 138.5
  SIG1 w6: U905.5@1451.46,1260.16 U905.6@1485.91,1260.16 ; R904.2@1486.19,1227.78 1486.19,1259.88 U905.6@1485.91,1260.16 ; U900.42@1543.03,1294.88 1530.39,1294.88 1495.67,1260.16 U905.6@1485.91,1260.16
9_VBUS: C908.1 R928.2 U906.1 U906.2 U906.4 U906.5 U906.6 U906.7 U906.9 U906.10 U1200.U4 | length 2192.4
  SIG1 w5.5: 1546.04,1785.35 2090.65,1785.35
  SIG1 w6: R928.2@1418.56,1094.66 R928.2@1420.76,1094.66 ; 1477.59,1716.9 1546.04,1785.35 ; 2090.65,1785.35 v1(2279.06,1973.76) ; U1200.U4@2209.03,2322.34 2215.25,2322.34 2404.69,2132.91 2424.78,2132.91 v1(2441.05,2149.18)
  SIG1 w10: U906.1@1406.8,1138.7 U906.10@1406.8,1173.15 1406.8,1197.5 1401.47,1202.84 1401.47,1515.13 1477.59,1591.25 1477.59,1716.9 ; U906.2@1426.48,1138.7 U906.9@1426.48,1173.15 ; U906.4@1465.85,1138.7 U906.7@1465.85,1173.15 ; U906.5@1485.54,1138.7 U906.6@1485.54,1173.15
  SIG3 w4: v1(2279.06,1973.76) 2309.12,2003.82
  SIG3 w6: 2309.12,2003.82 2386.48,2081.18 2386.48,2107.06 2410.01,2130.59 2422.46,2130.59 v1(2441.05,2149.18)
10_1: J1000.1 R1001.2 U1001.1 U1001.10 | length 834.1
  SIG1 w6: R1001.2@2649.76,1922.86 2653.58,1919.04 U1001.1@2685.88,1919.04 U1001.10@2720.33,1919.04 2739.37,1919.04 2781.3,1877.11 2781.3,1723.51 2924.85,1579.96 v1(2924.85,1252.92)
10_2: J1000.2 R1003.2 U1001.2 U1001.9 | length 864.2
  SIG1 w6: R1003.2@2649.76,1887.3 2661.81,1899.35 U1001.2@2685.88,1899.35 U1001.9@2720.33,1899.35 2734.48,1899.35 2762.25,1871.58 2762.25,1707.44 2894.08,1575.6 2894.08,1234.47 v1(2924.85,1203.71)
10_3: J1000.3 R1005.2 U1001.4 U1001.7 | length 873.7
  SIG1 w6: R1005.2@2649.76,1851.74 2658,1859.98 U1001.4@2685.88,1859.98 2736.62,1859.98 2742.91,1853.7 2742.91,1689.09 2864.36,1567.64 2864.36,1214.99 v1(2924.85,1154.5)
+3V3: C200.2 C201.2 C300.2 C301.2 C302.2 C303.2 C304.2 C305.2 C306.2 C307.2 C308.2 C309.2 C310.2 C311.2 C312.2 C313.2 C400.2 C401.2 C402.2 C403.2 C404.2 C405.2 C406.2 C407.2 C408.2 C409.2 C410.2 C500.2 C501.2 C700.1 C701.2 C702.2 C704.2 C705.1 C706.2 C707.1 C708.1 C709.1 C714.1 C715.2 C716.2 C717.1 C718.1 C719.2 C720.2 C721.1 C802.2 C803.2 C806.2 C807.2 C902.2 C907.1 C1000.2 C1001.1 C1200.2 C1201.2 C1202.2 C1203.2 C1204.2 C1205.2 C1206.2 C1207.2 C1208.2 C1209.2 C1210.2 C1211.2 C1212.2 C1213.2 C1214.2 C1215.2 C1216.2 C1217.2 C1218.2 C1219.2 C1220.2 C1221.2 C1224.2 C1225.2 C1226.2 C1227.2 C1228.2 C1302.2 C1303.1 C1304.1 C1305.1 J600.6 J600.7 J700.6 J700.7 J1000.4 L200.2 L202.1 Q700.S R200.2 R201.2 R400.1 R402.1 R404.1 R406.1 R408.1 R410.1 R412.1 R414.1 R416.1 R420.1 R500.2 R700.1 R800.1 R802.1 R808.1 R810.1 R902.1 R903.1 R904.1 R1372.1 R1383.2 R1386.1 R1387.1 RT800.2 RT801.2 RT802.2 RT803.2 U200.14 U300.A7 U300.B2 U300.B7 U300.C9 U300.D9 U300.E1 U300.F9 U300.L1 U300.L7 U300.M9 U300.N9 U300.P2 U300.P7 U300.R7 U400.B1 U400.C2 U400.C6 U400.E6 U400.F5 U400.J10 U400.K9 U400.M4 U400.N4 U400.P3 U400.P5 U500.8 U501.8 U700.1 U700.6 U700.7 U701.6 U702.1 U702.6 U703.1 U703.5 U703.6 U704.1 U704.16 U707.6 U707.13 U707.14 U707.16 U712.1 U712.8 U713.6 U713.13 U713.14 U713.16 U714.2 U714.3 U714.5 U800.5 U801.5 U802.5 U803.5 U900.26 U900.36 U1000.2 U1000.3 U1200.A6 U1200.B1 U1200.C17 U1200.E6 U1200.E9 U1200.E11 U1200.F5 U1200.F17 U1200.G5 U1200.G13 U1200.G17 U1200.H5 U1200.H13 U1200.J13 U1200.K5 U1200.K13 U1200.L5 U1200.L13 U1200.M5 U1200.M13 U1200.N7 U1200.N8 U1200.N10 U1200.N11 U1200.N12 U1200.P17 U1200.U12 U1301.5 Y1300.4 Y1301.4 | length 7305.7
  SIG1 w4: v2(2142.1,3146.94) U300.R7@2157.85,3131.19
  SIG1 w6: v1(2541.15,1959.8) 2541.15,1999.35 ; U703.5@2552.34,2014.11 2545.78,2014.11 2541.15,2009.48 2541.15,1999.35 ; v1(2612.96,1995.11) 2607.73,2000.33 U703.1@2573.01,2000.33 U703.6@2552.34,2000.33 2542.13,2000.33 2541.15,1999.35 ; U712.1@2680.57,2754.84 U712.8@2714.03,2754.84
  SIG1 w8: v2(1041.3,3013.52) 1055.53,2999.3 U400.J10@1061.14,2999.3 ; v2(1067.4,3041.32) 1080.47,3028.24 1080.47,3019.34 U400.K9@1080.82,3018.99 ; v1@1104.55,2533.26 R500.2@1137.38,2500.43 ; v2(1109.02,2939.59) v2@1141.39,2939.59 ; U400.C6@1139.88,2881.19 v2@1139.88,2898.22 ; v2(1139.86,2900.51) U400.E6@1139.88,2920.56 1139.88,2935.08 1145.04,2940.24 U400.F5@1159.56,2940.24 ; U400.P5@1159.56,3097.73 1159.56,3119.52 v2(1160.59,3120.54) ; U400.M4@1179.25,3058.36 U400.N4@1179.25,3078.04 U400.P3@1198.93,3097.73 v2(1198.91,3120.54) ; v2(1198.91,3120.54) v2(1238.21,3120.54) ; U400.C2@1218.62,2881.19 U400.B1@1238.3,2861.5 ; v2(1257.65,2880.19) 1242.97,2865.5 1242.8,2865.5 1238.8,2861.5 U400.B1@1238.3,2861.5 ; v2(1257.84,2843.72) 1256.08,2843.72 U400.B1@1238.3,2861.5 ; U200.14@1341.47,1516.48 1361.53,1516.48 v1@1361.66,1516.35 ; v2@1694.47,3115.82 1701.54,3115.82 U300.A7@1716.9,3131.19 ; v2(1732.65,2957.96) U300.B2@1748.4,2973.71 ; v2(1732.65,3115.44) U300.B7@1748.4,3131.19 ; v1(1734.73,1646.12) 1738.22,1649.6 C1305.1@1782.45,1649.6 ; v2(1764.15,3209.93) U300.C9@1779.9,3194.18 ; v2(1795.64,3178.43) U300.D9@1811.39,3194.18 ; v2(1827.14,2957.96) U300.E1@1842.89,2942.21 ; v2(1858.64,3178.43) U300.F9@1874.38,3194.18 ; v1(1897.32,2156.23) 1898.18,2157.09 R1372.1@1911.8,2157.09 ; v2(2016.12,2957.96) U300.L1@2031.86,2942.21 ; U300.L7@2031.86,3131.19 v2(2047.61,3115.44) ; v2(2047.61,3209.93) U300.M9@2063.36,3194.18 v2(2079.11,3209.93) U300.N9@2094.86,3194.18 ; v2@2110.6,2989.46 U300.P2@2126.35,2973.71 ; v2(2110.6,3146.94) U300.P7@2126.35,3131.19 ; v2(2142.1,3146.94) U300.R7@2157.85,3131.19 ; U700.1@2469.08,2010.96 U700.7@2469.08,2056.24 2469.08,2072.69 2497.86,2101.47 v1(2497.86,2103.81) v1(2529.23,2103.81) 2522.71,2097.29 2522.71,2087.6 2514.79,2079.68 2498.51,2079.68 2484.82,2065.99 U700.6@2484.82,2056.24 ; U1000.3@2518.02,1912.94 2518.02,1930.63 2507.16,1941.5 v1(2507.16,1959.8) v1(2541.15,1959.8) 2541.15,1939.34 2533.77,1931.96 U1000.2@2533.77,1912.94 ; v1(2527.47,2993.99) 2528.1,2993.35 2528.14,2993.39 U707.16@2543.52,2993.39 ; v1(2551.36,2199.97) 2583.09,2199.97 ; U707.6@2559.7,2906.39 2559.7,2885.51 2561.78,2883.43 v2(2564.38,2883.43) ; v1(2568.23,3053.93) 2575.45,3046.72 U707.14@2575.45,3000.88 ; v1(2582.86,2248.68) v1(2617.88,2248.68) ; U704.16@2589.44,2333.29 2589.44,2292.74 v1(2582.86,2286.16) ; U707.13@2591.2,3000.88 2591.2,3009.33 2606.79,3024.92 ; U714.5@2596.12,2820.93 2605.37,2820.93 v1@2605.63,2821.18 ; U714.2@2604,2765.81 2642.04,2765.81 ; U714.3@2604,2781.56 C720.2@2641.92,2781.56 ; v1(2606.79,3053.93) 2606.79,3024.92 ; U704.1@2609.12,2333.29 2609.12,2315.15 2617.88,2306.39 v1(2617.88,2286.16) v1(2582.86,2286.16) ; v1(2612.95,1959.8) v1(2612.96,1995.11) ; v1(2637.97,2199.97) 2583.09,2199.97 ; v1(2641.04,2752.84) 2642.04,2753.84 2642.04,2765.81 ; C720.2@2642.04,2790.35 2642.04,2765.81 ; U713.16@2664.25,3000.88 2664.25,3011.01 2650.34,3024.92 2606.79,3024.92 ; U713.6@2680,2906.39 2680,2931.95 v1(2680.98,2931.95) ; v2(2680.24,2826.98) 2681.1,2826.12 U712.1@2681.1,2756.26 ; v2(2683.31,3046.15) 2695.74,3033.72 U713.14@2695.74,3000.88 ; v1(2683.83,2029.65) 2722.49,2029.65 v1(2722.85,2029.29) ; U701.6@2706.46,1993.12 2740.01,1993.12 v1(2742.32,1990.82) ; U713.13@2711.49,3000.88 2711.49,3036.79 v2(2720.85,3046.15) ; v1(2582.86,2286.16) 2582.86,2246.68 2583.09,2246.44 2583.09,2199.97
  SIG1 w10: J700.7@2895.33,2262.77 2975.69,2262.77 v1(2995.53,2242.94) ; J700.6@2895.49,2242.95 v1(2938.59,2242.94)
  SIG1 w12: v1(506.91,2813.3) 525.79,2794.41 J600.7@579.13,2794.41 ; v1(536.03,2814.11) J600.6@579.13,2814.1 ; U802.5@724.17,613.54 U802.5@728.91,618.28 ; C501.2@1065.05,2166.58 1066.2,2167.73 U500.8@1066.2,2220.16 ; v1(1160.34,1743.82) v1(1160.34,1719.16) v1(1160.34,1694.5) 1160.34,1666.07 1147.83,1653.56 R200.2@1147.83,1616.72 1148.6,1616.72 RT800.2@1185.3,1580.02 ; C500.2@1333.32,2170.69 1359.49,2196.86 1359.49,2211.28 1359.36,2211.41 U501.8@1359.36,2219.48 ; U501.8@1359.36,2229.98 1359.49,2229.85 U501.8@1359.49,2219.48 ; v1(1559.29,2152.88) 1559.36,2152.81 1559.36,2115.85 1561.35,2113.86 1598.21,2113.86 v1(1600.13,2111.95) ; v1@1689.86,2385.33 U1200.A6@1705.09,2385.33 ; v2(1716.81,2207.48) 1736.59,2227.25 U1200.B1@1736.59,2227.85 ; C1303.1@1731.78,2152.12 v1(1731.78,2116.13) 1733.69,2114.21 1767.57,2114.21 v1(1769.48,2112.3) ; v2@1748.17,2751.71 U1200.C17@1768.08,2731.79 ; U1200.E6@1831.08,2385.33 1848.76,2367.65 v2(1869.99,2367.65) v2(1907.91,2367.65) v2(1937.63,2367.65) 1949.66,2379.68 1967.72,2379.68 v2(1979.75,2367.65) v2(2015.67,2367.65) v2(2051.59,2367.65) ; U1200.E9@1831.08,2479.82 1852.37,2501.12 1852.37,2510.21 ; U1200.E11@1831.08,2542.81 1852.37,2521.52 1852.37,2510.21 ; U1200.F5@1862.57,2353.84 v2@1862.57,2366.24 ; U1200.F17@1862.57,2731.79 v2(1878.32,2716.04) U1200.G17@1894.07,2731.79 v2(1909.82,2716.04) ; U1200.G5@1894.07,2353.84 1894.07,2367.06 ; U1200.G13@1894.07,2605.81 1894.07,2596.02 v2(1898.57,2591.52) ; v2(1911.01,2495.57) 1887.01,2495.57 1872.37,2510.21 1852.37,2510.21 ; U1200.H5@1925.56,2353.84 1925.56,2367.23 ; U1200.H13@1925.56,2605.81 1925.56,2595.28 v2(1929.64,2591.2) v2@1961.21,2591.2 ; v2@1957.06,2595.36 U1200.J13@1957.06,2605.81 ; U1200.K5@1988.56,2353.84 1988.56,2367.09 ; U1200.L5@2020.05,2353.84 v2@2020.05,2363.27 ; U1200.M5@2051.55,2353.84 U1200.M5@2051.55,2353.84 v2(2051.59,2367.65) ; 2071.79,2542.81 U1200.N11@2083.05,2542.81 ; 2072.18,2511.32 U1200.N10@2083.05,2511.32 ; 2072.76,2574.31 U1200.N12@2083.05,2574.31 ; v2(2098.79,2716.04) U1200.P17@2114.54,2731.79 ; v2(2193.28,2590.06) U1200.U12@2209.03,2574.31 ; v1(2500.93,3178.77) 2546.1,3178.77 C807.2@2547.62,3177.25 ; U1200.L13@2020.05,2605.81 U1200.M13@2051.55,2605.81 2070.4,2586.96 v2(2071.74,2586.96) v2(2071.74,2554.13) v2(2071.74,2521.3) 2071.74,2502.58 2058.01,2488.85 v2(2058.01,2445.3) 2061.03,2448.33 U1200.N8@2083.05,2448.33 v2(2098.79,2432.58) 2068.96,2402.75 2068.96,2398.25 2065.44,2394.73 2065.44,2381.5 v2(2051.59,2367.65) ; U1200.L13@2020.05,2605.81 v2(2004.3,2621.55) U1200.K13@1988.56,2605.81 2000.64,2593.73 v2(2000.64,2591.52) 2005.77,2591.52 U1200.L13@2020.05,2605.81
  SIG3 w12: v1(1120.67,1482.11) 1139.29,1500.74 1139.29,1722.78 v1(1160.34,1743.82)
  SIG6 w8: v2(1041.3,3013.52) 1064.66,3013.52 C402.2@1064.88,3013.74 1064.88,3038.8 v2(1067.4,3041.32) ; C400.2@1065.08,2974.67 C402.2@1065.08,3013.55 ; C902.2@1562.47,1414.65 1563.14,1413.97 v1(1563.7,1413.97) ; C1302.2@1892.62,2479.55 1907.16,2494.09 1909.53,2494.09 v2(1911.01,2495.57) ; RT803.2@2059.4,3068 2080.7,3089.3 2143.58,3089.3 2234.98,3180.7 v2(2349.82,3180.7)
  SIG6 w12: C1220.2@1854.07,2519.11 1892.62,2480.55 1892.62,2479.55 C1302.2@1892.62,2478.76 ; v2(1854.07,2527.07) 1854.07,2540.97 1869.83,2556.73 1869.83,2562.77 v2(1898.57,2591.52) ; C1206.2@2038.42,2727.53 2049.91,2716.04 v2(2098.79,2716.04) ; v2(2051.59,2367.65) 2058.86,2367.65 2076.72,2385.51 2076.72,2437.11 2068.53,2445.3 v2(2058.01,2445.3) ; RT801.2@2245,1559.07 2245,1703.4 v1(2245.16,1703.56)
  SIG6 w20: v1(587.9,1681.65) 587.9,643.69 637.29,594.3 v1(676.37,594.3) ; v1(754.25,1835.86) 788.75,1835.86 v1(806.48,1853.6) 841.53,1888.65 ; v1(957.92,1927.69) 880.58,1927.69 841.53,1888.65 ; 1169.05,1796.16 1141.06,1824.15 905.58,1824.15 841.53,1888.21 841.53,1888.65
  other v1: 2908.67,1105.48 2942.37,1105.48 1448.79,1227.78 1444,1376.49 1444,1409.42 1760.55,1413.97 1360.56,1516.35 1181.12,1694.5 1181.12,1719.16 1181.12,1743.82 1201.9,1743.82 2506.84,1764.72 1159.34,1768.48 1181.12,1768.48 1201.9,1768.48 1257.26,1770.75 1293.78,1770.75 1330.29,1770.75 2458.11,1779.28 1160.34,1793.15 1181.12,1793.15 1201.9,1793.15 2506.96,1799.04 1257.26,1803.26 1293.78,1803.26 1330.29,1803.26 1559.44,2115.78 2046.54,2126.04 1732.54,2152.88 1065.29,2169.79 1327.39,2171.01 1066.6,2219.14 1066.6,2239.99 1687.91,2381.38 1104.55,2535.83 1027.58,2646 1098.77,2646 1169.96,2646 1241.15,2646 1368.83,2684.01 1404.29,2755.32 2605.63,2822.68 1404.29,2824.96 1404.29,2894.6 1404.29,2967.23 1177.48,3013.74 1404.29,3038.32
  other v2: 1359.49,2227.16 1359.49,2246.98 1961.4,2591.02 2035.8,2611.55 1749.46,2753 2641.04,2789.35 2680.24,2790.98 1139.86,2939.59 2111.6,2989.46 1691.82,3116.44
+5V: C210.2 C211.2 J600.1 J600.2 J700.1 J700.2 L201.2 R204.2 R205.2 U202.14 | length 2815.8
  SIG1 w8: R204.2@780.45,1559.57 797.1,1576.22 C211.2@797.1,1602.41
  SIG1 w10: J700.1@2895.33,2144.66 2935.99,2144.66 v1(2938.56,2142.09) ; J700.2@2895.49,2164.21 2931.71,2164.21 v1(2938.32,2170.81)
  SIG1 w12: v1@614.2,2913.36 613.22,2912.38 J600.1@579.29,2912.38 J600.2@579.29,2892.69 614.26,2892.69 614.81,2892.14 634.08,2892.14 v1(634.08,2892.21)
  SIG3 w12: v1(749.15,1437.09) 782.25,1470.2 782.25,1636.89 804.19,1658.82
  SIG6 w30: v1(989.83,1730.61) 998.85,1730.61 1076.83,1652.64 1329.38,1652.64 1352.55,1675.8 1755.15,1675.8 1775.58,1655.37 2076.51,1655.37 2191.12,1769.98 2318.92,1769.98 2354.72,1734.18 2637.11,1734.18 2753.75,1850.81 2753.75,1924.07 2938.59,2108.92 2938.59,2170.53 v1(2938.32,2170.81)
  other v1: 974.29,1479.27 803.36,1606.36 825.15,1606.36 803.36,1636.02 825.15,1636.02 846.93,1636.02 803.36,1678.24 825.15,1678.24 846.93,1678.24 803.36,1707.91 825.15,1707.91 846.93,1707.91 916.81,1730.61 953.32,1730.61 916.81,1763.12 953.32,1763.12 989.83,1763.12 611.26,2892.69 611.2,2913.36
_9: J700.9 R701.2 U710.1 U710.10 | length 533.6
  SIG1 w6: v1(2748.92,2172.51) 2748.92,2173.65 2749.87,2174.61 U710.10@2774.38,2174.61 U710.1@2808.83,2174.61 2809.76,2173.67 2820.25,2173.67 v1(2829.32,2164.6) ; J700.9@2895.49,2302 v1(2938.59,2301.99)
  SIG3 w5.5: v1(2829.32,2164.6) 2829.9,2164.6 2938.59,2273.29 v1(2938.59,2301.99)
  SIG6 w6: v1(2580.74,2067.05) 2599.64,2085.95 2678.57,2085.95 2748.92,2156.3 v1(2748.92,2172.51)
_10: J700.10 U700.4 U710.2 U710.9 | length 732.6
  SIG1 w6: U700.4@2508.45,2032.62 2525.09,2032.62 v1(2533.61,2024.09) ; v1@2747.78,2197.47 2747.78,2194.66 2748.14,2194.29 U710.9@2774.38,2194.29 U710.2@2808.83,2194.29 2836.41,2194.29 v1(2838.16,2196.04) ; J700.10@2895.33,2321.83 2975.69,2321.83 v1(2995.53,2301.99)
  SIG6 w6: v1(2533.61,2024.09) 2533.61,2044.22 2686.54,2197.14 2747.46,2197.14 v1@2747.78,2197.47 ; v1(2838.16,2196.04) 2860.16,2196.04 2943.36,2279.24 2976.89,2279.24 2995.53,2297.87 v1(2995.53,2301.99)
  other v1: 2748.92,2197.47
_11: J700.11 R705.2 U710.4 U710.7 | length 510.8
  SIG1 w6: R705.2@2724.39,2143.3 2732.19,2151.1 2732.19,2218.52 2747.33,2233.66 U710.7@2774.38,2233.66 U710.4@2808.83,2233.66 2836.41,2233.66 v1(2838.16,2231.92) ; J700.11@2895.33,2341.51 2975.99,2341.51 v1(2995.53,2361.05)
  SIG6 w6: v1(2838.16,2231.92) 2937.06,2330.82 2965.62,2330.82 2995.53,2360.72 v1(2995.53,2361.05)
_13: J700.13 R707.2 U710.5 U710.6 | length 438.3
  SIG1 w6: R707.2@2690.64,2185.22 2713.04,2207.62 2713.04,2223.09 2743.3,2253.35 U710.6@2774.38,2253.35 U710.5@2808.83,2253.35 2836.41,2253.35 v1(2838.16,2255.1) ; J700.13@2895.33,2380.88 2947.22,2380.88 v1(2967.06,2361.05)
  SIG3 w5.5: v1(2838.16,2255.1) 2861.11,2255.1 v1(2967.06,2361.05)
_14: J700.14 R708.2 U711.1 U711.10 | length 486.3
  SIG1 w6: R708.2@2690.64,2256.58 2719.33,2256.58 2746.74,2283.99 U711.10@2774.38,2283.99 U711.1@2808.83,2283.99 2836.41,2283.99 v1(2838.16,2282.24) ; J700.14@2895.33,2400.57 2975.99,2400.57 v1(2995.53,2420.1)
  SIG6 w6: v1@2839.13,2283.02 2879.85,2323.74 2879.85,2332.62 2933.06,2385.82 2961.25,2385.82 v1(2995.53,2420.1)
_15: J700.15 R709.2 U711.2 U711.9 | length 365.5
  SIG1 w6: R709.2@2690.64,2327.94 2722.56,2327.94 2746.82,2303.67 U711.9@2774.38,2303.67 U711.2@2808.83,2303.67 2836.41,2303.67 v1(2838.16,2305.42) ; J700.15@2895.49,2420.11 v1(2938.59,2420.1)
  SIG3 w5.5: v1(2838.16,2305.42) 2851.46,2305.42 2938.59,2392.55 v1(2938.59,2420.1)
_16: J700.16 R710.2 U711.4 U711.7 | length 413
  SIG1 w6: R710.2@2690.64,2399.3 2746.89,2343.04 U711.7@2774.38,2343.04 U711.4@2808.83,2343.04 2836.41,2343.04 v1(2838.16,2341.3) ; J700.16@2895.33,2439.94 2947.22,2439.94 v1(2967.06,2420.1)
  SIG6 w6: v1(2838.16,2341.3) 2861.27,2341.3 2920.47,2400.5 2947.46,2400.5 v1(2967.06,2420.1)
_17: J700.17 R711.2 U711.5 U711.6 | length 568.8
  SIG1 w6: v1(2718.35,2400.99) 2718.35,2400.42 2756.04,2362.73 U711.6@2774.38,2362.73 U711.5@2808.83,2362.73 2836.41,2362.73 v1(2838.16,2364.48) ; J700.17@2895.33,2459.62 2975.99,2459.62 v1(2995.53,2479.16)
  SIG3 w5.5: v1(2690.64,2508.06) 2690.64,2428.13 2717.78,2400.99 v1(2718.35,2400.99) ; v1(2838.16,2364.48) 2855.21,2364.48 2940.16,2449.42 2965.79,2449.42 v1(2995.53,2479.16)
_19: J700.19 U706.4 U715.1 U715.10 | length 503.3
  SIG1 w6: U706.4@2693.44,2538.97 2712.82,2519.59 2712.82,2430.15 2749.6,2393.37 U715.10@2774.38,2393.37 U715.1@2808.83,2393.37 2836.41,2393.37 v1(2838.16,2391.62) ; J700.19@2895.33,2498.99 2947.22,2498.99 v1(2967.06,2479.16)
  SIG6 w6: v1(2838.16,2391.62) 2879.53,2391.62 v1(2967.06,2479.16)
_20: J700.20 U706.6 U715.2 U715.9 | length 614.5
  SIG1 w6: U706.6@2693.44,2586.22 2696.36,2583.29 2718.71,2583.29 2726.31,2575.69 2726.31,2440.51 2753.77,2413.05 U715.9@2774.38,2413.05 U715.2@2808.83,2413.05 2836.41,2413.05 v1(2838.16,2414.8) ; J700.20@2895.33,2518.68 2975.99,2518.68 v1(2995.53,2538.21)
  SIG6 w6: v1(2838.16,2414.8) 2849.98,2414.8 2937.8,2502.62 2962.26,2502.62 2995.53,2535.89 v1(2995.53,2538.21)
_21: J700.21 U709.4 U715.4 U715.7 | length 501.8
  SIG1 w6: U709.4@2693.44,2613.5 2695.55,2615.62 2734.49,2615.62 2745.01,2605.1 2744.86,2604.95 v1(2744.2,2604.95) ; v1@2746.79,2452.42 U715.7@2774.38,2452.42 U715.4@2808.83,2452.42 2836.41,2452.42 v1(2838.16,2450.68) ; J700.21@2895.49,2538.22 v1(2938.59,2538.21)
  SIG3 w5.5: v1(2744.2,2604.95) 2746.04,2604.95 2765.01,2585.98 2765.01,2470.64 v1(2745.04,2450.68) ; v1(2838.16,2450.68) 2851.06,2450.68 v1(2938.59,2538.21)
_22: J700.22 U709.6 U715.5 U715.6 | length 562.1
  SIG1 w6: U709.6@2693.44,2660.74 2712.96,2660.74 v1@2713.04,2660.83 ; v1@2746.79,2472.11 U715.6@2774.38,2472.11 U715.5@2808.83,2472.11 2836.41,2472.11 v1(2838.16,2473.86) ; J700.22@2895.33,2558.05 2947.22,2558.05 v1(2967.06,2538.21)
  SIG3 w5.5: v1@2713.04,2660.83 2695.36,2643.15 2695.36,2553.57 2720.9,2528.03 2720.9,2498 v1(2745.04,2473.86)
  SIG6 w6: v1(2838.16,2473.86) 2880.41,2473.86 2925.69,2519.13 2947.26,2519.13 2966.34,2538.21 v1(2967.06,2538.21)
  other v1: 2713.79,2660.61
_23: J700.23 U705.1 U716.1 U716.10 | length 597.5
  SIG1 w6: U705.1@2566.42,2505.55 2589.2,2482.78 v1(2627.08,2482.78) ; v1@2746.79,2502.75 U716.10@2774.38,2502.75 U716.1@2808.83,2502.75 2836.41,2502.75 v1(2838.16,2501) ; J700.23@2895.33,2577.73 2975.99,2577.73 v1(2995.53,2597.27)
  SIG6 w6: v1(2627.08,2482.78) 2726.82,2482.78 v1(2745.04,2501) ; v1(2838.16,2501) 2873.07,2501 2931.56,2559.5 2965.11,2559.5 2995.53,2589.92 v1(2995.53,2597.27)
_24: J700.24 U705.3 U716.2 U716.9 | length 500.5
  SIG1 w4: v1(2566.38,2567.8) 2564.37,2565.79 2567.41,2562.76 U705.3@2567.41,2552.8
  SIG1 w6: v1@2746.79,2522.43 U716.9@2774.38,2522.43 U716.2@2808.83,2522.43 2836.41,2522.43 v1(2838.16,2524.18) ; J700.24@2895.49,2597.28 v1(2938.59,2597.27)
  SIG6 w6: v1(2566.38,2567.8) 2567.04,2567.8 2583.93,2550.9 2583.93,2537.4 2596.61,2524.72 2639.12,2524.72 2654.59,2540.19 2729.03,2540.19 v1(2745.04,2524.18) ; v1(2838.16,2524.18) 2865.51,2524.18 v1(2938.59,2597.27)
_25: J700.25 U708.1 U716.4 U716.7 | length 523.3
  SIG1 w4: U708.1@2566.27,2605.17 2566.27,2589.02 v1(2566.38,2589.02)
  SIG1 w6: v1@2746.79,2561.8 U716.7@2774.38,2561.8 U716.4@2808.83,2561.8 2836.41,2561.8 v1(2838.16,2560.06) ; J700.25@2895.33,2617.1 2947.22,2617.1 v1(2967.06,2597.27)
  SIG3 w5.5: v1(2838.16,2560.06) 2929.85,2560.06 v1(2967.06,2597.27)
  SIG6 w6: v1(2566.38,2589.02) 2567.15,2589.02 2596.11,2560.06 v1(2745.04,2560.06)
_26: J700.26 U708.3 U716.5 U716.6 | length 644.6
  SIG1 w6: U708.3@2567.26,2652.41 2567.26,2660.15 2582.95,2675.85 2607.79,2675.85 2613.57,2681.63 v1(2637.93,2681.63) ; v1@2746.79,2581.49 U716.6@2774.38,2581.49 U716.5@2808.83,2581.49 2836.41,2581.49 v1(2838.16,2583.24) ; J700.26@2895.33,2636.79 2975.99,2636.79 v1(2995.53,2656.32)
  SIG6 w6: v1(2637.93,2681.63) 2674.86,2644.7 2674.86,2608.13 2699.76,2583.24 v1(2745.04,2583.24) ; v1(2838.16,2583.24) 2893.65,2583.24 2929.03,2618.61 2957.82,2618.61 v1(2995.53,2656.32)
_27: J700.27 U712.6 U717.1 U717.10 | length 389
  SIG1 w6: U712.6@2714.03,2727.28 2735.62,2727.28 2740.04,2722.86 2740.04,2630.96 2758.86,2612.13 U717.10@2774.38,2612.13 U717.1@2808.83,2612.13 2836.41,2612.13 v1(2838.16,2610.38) ; J700.27@2895.49,2656.33 v1(2938.59,2656.32)
  SIG6 w6: v1(2838.16,2610.38) 2892.65,2610.38 v1(2938.59,2656.32)
_28: J700.28 U712.7 U717.2 U717.9 | length 439.9
  SIG1 w6: U712.7@2714.03,2741.06 2735.83,2741.06 2752.4,2724.48 2752.4,2636.57 2757.15,2631.81 U717.9@2774.38,2631.81 U717.2@2808.83,2631.81 2836.41,2631.81 v1(2838.16,2633.56) ; J700.28@2895.33,2676.16 2947.22,2676.16 v1(2967.06,2656.32)
  SIG3 w5.5: v1(2838.16,2633.56) 2944.3,2633.56 v1(2967.06,2656.32)
_29: J700.29 R713.1 U718.1 U718.10 | length 573.9
  SIG1 w6: v1(2774.7,2707.84) 2774.38,2708.16 U718.10@2774.38,2721.51 U718.1@2808.83,2721.51 2836.41,2721.51 v1(2838.16,2719.76) ; J700.29@2895.33,2695.84 2947.53,2695.84 v1(2967.06,2715.38)